# Altium PCB PA_Channel_RF1.PcbDoc (part 2 of 2)
Units mm, origin at the board's own origin, x right, y up, seen from the top; angles counter-clockwise.
Board outline 79.99 x 29.49 mm, 2 copper layers (Top Layer, Bottom Layer), stack 1.071 mm thick; 66 components, 88 nets, 184 pads, 409 vias.
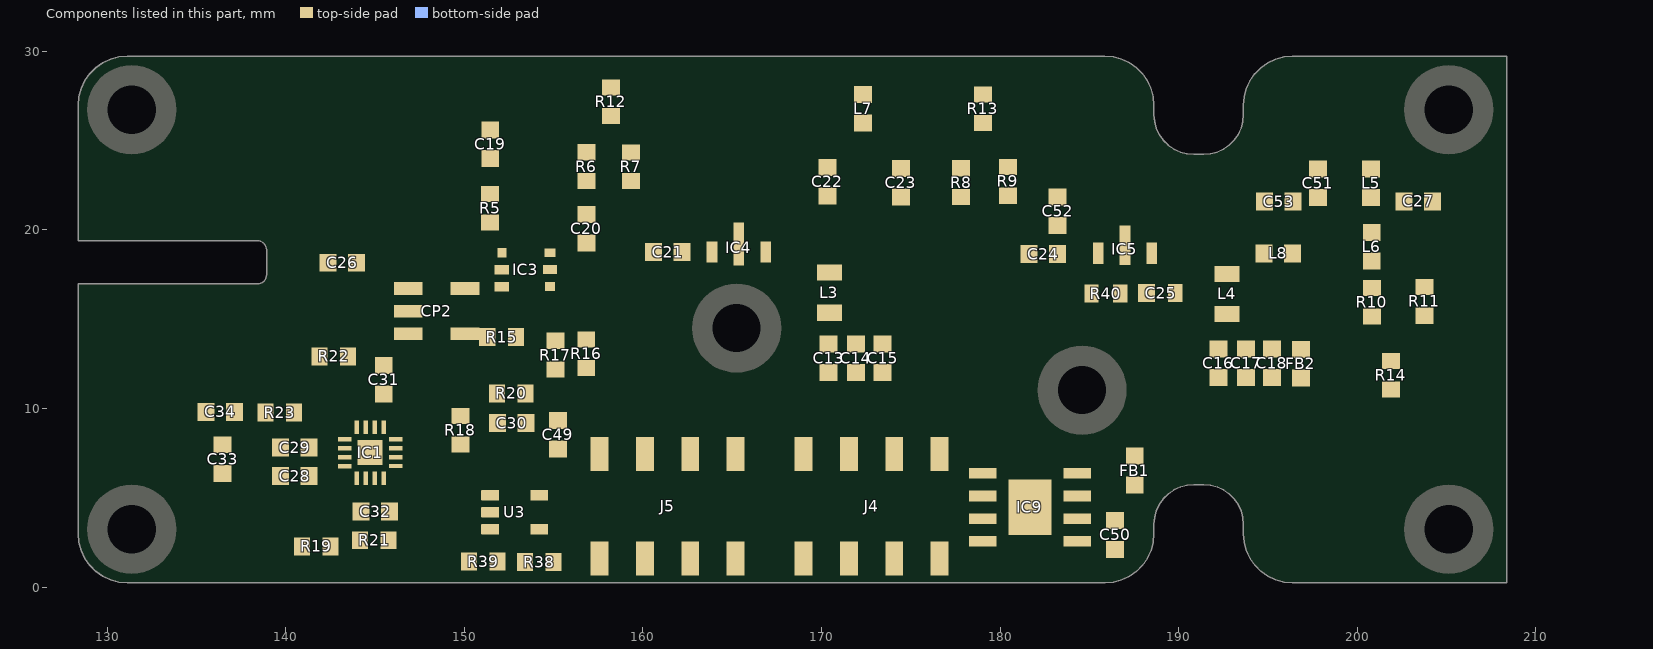
[diagram p2: the components of this part, seen from the top]

## Other copper
Top Layer:
  rectangle net NetC13_1: 169.18,13.325 174.117,15.374
  rectangle net GND: 169.322,9.972 174.259,12.021
  rectangle net NetC16_1: 191.464,13.283 197.706,15.315
  rectangle net GND: 191.163,9.701 196.1,11.75
  region net GND: 139.693,10.615 138.678,10.63 138.672,16.735 138.683,15.64 140.928,15.64 140.933,13.46 142.485,13.46 142.49,12.355 140.933,12.35 140.933,10.635 139.693,10.63
  region net GND: 129.536,1.088 129.212,1.412 128.95,1.786 128.756,2.201 128.638,2.643 128.598,3.099 128.598,12.475 139.688,12.475 139.688,10.615 134.598,10.615 134.598,0.474 131.223,0.474 130.767,0.514 130.325,0.632 129.91,0.826
  region net GND: 128.597,19.63 128.592,26.849 128.632,27.305 128.75,27.748 128.944,28.164 129.207,28.539 129.531,28.864 129.906,29.126 130.326,29.324 130.75,29.45 131.238,29.479 134.456,29.479 134.461,19.635
  region net GND: 128.604,20.369 128.599,24.868 134.149,24.874 134.149,29.48 131.132,29.48 131.221,29.48 130.774,29.448 130.333,29.33 129.919,29.137 129.546,28.875 129.222,28.552 128.961,28.179 128.767,27.765 128.649,27.323 128.609,26.868 128.639,27.325 128.757,27.768 128.951,28.184 129.214,28.559 129.538,28.883 129.913,29.146 130.329,29.34 130.772,29.459 131.009,29.479 186.063,29.48 186.289,29.46 186.71,29.347 187.106,29.163 187.464,28.913 187.773,28.604 188.023,28.247 188.207,27.851 188.32,27.429 188.359,26.983 188.359,26.458 188.396,26.04 188.507,25.623 188.69,25.233 188.951,24.867 189.321,24.497 189.677,24.282 190.44,23.999 191.907,23.999 192.615,24.329 192.968,24.577 193.271,24.881 193.518,25.233 193.701,25.623 193.812,26.04 193.849,26.458 193.849,26.982 193.888,27.428 194.001,27.85 194.184,28.246 194.435,28.604 194.743,28.912 195.101,29.163 195.497,29.346 195.919,29.46 196.365,29.499 208.107,29.499 208.112,24.243 205.109,24.238 205.109,20.345 203.656,20.34 203.651,24.714 203.494,24.824 203.195,25.17 202.962,25.537 202.876,25.746 202.8,25.989 202.751,26.364 202.756,26.736 195.374,26.736 195.374,22.155 195.569,22.155 195.574,21.049 195.374,21.044 195.374,20.749 192.823,20.744 192.818,22.728 192.608,22.728 191.603,22.725 189.304,22.728 189.304,20.334 184.679,20.329 184.671,21.247 182.668,21.247 182.663,27.299 179.584,27.299 179.584,27.024 178.479,27.019 178.474,27.299 172.874,27.299 172.874,27.024 171.769,27.019 171.764,27.299 167.704,27.299 167.704,20.424 163.079,20.419 163.074,27.689 158.784,27.689 158.784,27.439 157.679,27.434 157.674,27.689 154.219,27.689 154.219,25.368 154.119,25.363 154.119,25.014 152.714,25.009 152.709,25.363 152.019,25.363 152.019,25.014 150.914,25.009 150.909,25.363 148.234,25.363 148.234,22.733 140.939,22.728 140.939,20.754 138.684,20.749 138.679,22.728 131.109,22.728 131.109,20.374
  region net GND: 128.615,19.648 128.61,26.743 128.65,27.199 128.768,27.642 128.962,28.058 129.225,28.433 129.549,28.757 129.924,29.02 130.34,29.214 130.783,29.333 131.24,29.373 134.474,29.373 134.479,19.653
  region net GND: 152.963,8.643 152.952,16.335 153.958,16.34 153.963,14.56 153.966,13.455 153.951,8.648
  region net GND: 182.668,21.251 184.667,21.246 184.667,20.315 186.077,20.31 186.077,19.895 186.577,19.89 186.577,18.045 187.383,18.04 187.388,19.89 187.883,19.89 187.888,20.31 189.293,20.31 189.298,22.709 191.592,22.709 192.597,22.706 191.601,22.716 189.298,22.719 189.298,22.957 188.438,22.962 188.438,24.104 185.538,24.109 185.538,25.315 184.673,25.32 184.667,24.91 182.673,24.91 182.667,22.905 184.667,22.9 184.667,22.41 182.673,22.41
  region net NetC24_2: 182.669,16.909 182.667,20.739 183.778,20.739 183.778,19.32 185.933,19.32 185.938,18.045 183.778,18.04 183.778,17.05 185.533,17.05 185.538,15.775 183.973,15.77 183.967,15.94 183.641,15.94
  region net NetC25_2: 189.2,15.945 190.205,15.94 191.176,16.909 191.178,18.125 191.417,18.125 191.417,17.045 193.963,17.04 193.968,18.125 195.363,18.125 195.368,19.23 189.298,19.235 189.298,19.432 188.033,19.438 188.027,17.977 189.288,17.971 189.298,18.125 190.067,18.125 190.067,17.05 189.206,17.05
  region net GND: 192.597,22.719 192.811,22.709 192.811,20.73 195.363,20.725 195.368,21.025 195.373,22.135 195.368,24.446 192.829,24.451 192.968,24.549 193.272,24.854 193.521,25.208 193.264,24.862 192.961,24.557 192.609,24.31 191.899,23.979 192.614,24.3 192.811,24.439 192.811,22.719
  region net NetC51_2: 195.857,18.13 197.395,18.125 198.366,19.094 198.368,22.33 197.263,22.335 197.257,22.135 195.877,22.135 195.871,21.031 197.257,21.025 197.257,19.235 195.863,19.235
  region net NetC31_2: 144.921,9.844 145.346,9.839 145.346,8.571 145.602,8.571 145.608,9.839 146.027,9.839 146.032,11.344 144.927,11.349
  region net GND: 150.908,24.995 152.008,24.995 152.008,25.495 150.908,25.495
  region net NetC13_1: 169.193,14.364 171.733,14.364 171.733,15.864 169.193,15.864
  region net NetC22_2: 173.233,22.905 173.233,24.405 175.773,24.405 175.773,22.905
  region net NetC20_2: 156.286,20.32 157.386,20.32 157.386,23.32 156.286,23.32
  region net NetC22_2: 169.193,22.905 169.193,24.405 171.733,24.405 171.733,22.905
  region net GND: 152.358,13.455 152.358,14.555 153.961,14.555 153.961,13.455
  region net GND: 128.598,19.635 128.598,24.635 138.678,24.635 138.678,19.635
  region net GND: 128.598,11.735 128.598,16.735 138.678,16.735 138.678,11.735
  region net NetIC3_6: 154.29,18.445 154.29,18.995 155.09,18.995 155.09,18.445
  region net NetIC3_4: 154.29,16.335 154.29,17.095 155.09,17.095 155.09,16.335
  region net NetC19_1: 150.908,21.495 152.008,21.495 152.008,24.495 150.908,24.495
  region net GND: 150.908,24.995 152.008,24.995 152.008,25.495 150.908,25.495
  region net GND: 157.673,27.42 157.673,27.92 158.773,27.92 158.773,27.42
  region net GND: 171.763,27.005 171.763,27.505 172.863,27.505 172.863,27.005
  region net GND: 178.473,27.005 178.473,27.505 179.573,27.505 179.573,27.005
  region net NetC16_1: 191.423,14.275 193.963,14.275 193.963,15.775 191.423,15.775
  region net NetL6_2: 200.25,16.23 201.35,16.23 201.35,18.73 200.25,18.73
  region net GND: 162.753,11.747 162.747,17.134 164.977,17.14 164.977,18.135 165.783,18.14 165.788,17.14 167.693,17.14 167.698,11.753
  region net GND: 133.286,9.548 133.277,10.769 135.933,10.774 135.941,9.213 133.936,9.208 133.93,9.548
  region net NetC25_1: 186.327,15.775 187.607,15.77 187.612,15.94 188.697,15.94 188.703,17.045 186.333,17.05
  region net GND: 199.751,0.458 208.095,0.455 208.105,5.714 205.122,5.714 205.122,11.123 199.756,11.129
  region net NetC10_1: 203.231,16.23 204.337,16.225 204.342,17.225 205.098,17.225 205.098,16.942 208.098,16.942 208.098,18.62 205.098,18.62 205.098,18.335 204.205,18.335 203.233,17.366
  region net GND: 164.983,18.13 cw(c164.983,18.135) 164.977,18.135 164.977,19.985 cw(c164.983,19.985) 164.983,19.99 165.783,19.99 cw(c165.783,19.985) 165.788,19.985 165.788,18.135 cw(c165.783,18.135) 165.783,18.13
  region: 149.208,15.06 cw(c149.208,15.065) 149.202,15.065 149.202,15.825 cw(c149.208,15.825) 149.208,15.83 151.058,15.83 cw(c151.058,15.825) 151.063,15.825 151.063,15.065 cw(c151.058,15.065) 151.058,15.06
  region net GND: 138.678,20.73 cw(c138.678,20.735) 138.672,20.735 138.672,25.735 cw(c138.678,25.735) 138.678,25.74 140.928,25.74 cw(c140.928,25.735) 140.933,25.735 140.933,20.735 cw(c140.928,20.735) 140.928,20.73
  region net NetC26_2: 143.428,17.63 144.922,17.63 144.922,17.303 ccw(c144.928,17.303) 144.924,17.299 145.892,16.331 ccw(c145.896,16.335) 145.896,16.33 147.678,16.33 ccw(c147.678,16.335) 147.683,16.335 147.683,17.095 ccw(c147.678,17.095) 147.678,17.1 147.033,17.1 147.033,17.435 ccw(c147.028,17.435) 147.028,17.44 146.033,17.44 146.033,17.767 ccw(c146.028,17.767) 146.031,17.771 145.063,18.739 ccw(c145.06,18.735) 145.06,18.74 143.428,18.74 ccw(c143.428,18.735) 143.422,18.735 143.422,17.635 ccw(c143.428,17.635)
  region net NetC26_1: 139.178,17.63 cw(c139.178,17.635) 139.172,17.635 139.172,18.735 cw(c139.178,18.735) 139.178,18.74 142.928,18.74 cw(c142.928,18.735) 142.933,18.735 142.933,17.635 cw(c142.928,17.635) 142.928,17.63
  region net NetC22_1: 169.187,17.134 169.187,22.405 cw(c169.193,22.405) 169.193,22.41 171.733,22.41 cw(c171.733,22.405) 171.738,22.405 171.738,17.134 cw(c171.733,17.134) 171.733,17.129 169.193,17.129 cw(c169.193,17.134)
  region net GND: 163.074,20.401 cw(c163.074,20.406) 163.068,20.406 163.068,25.406 cw(c163.074,25.406) 163.074,25.411 167.694,25.411 cw(c167.694,25.406) 167.699,25.406 167.699,20.406 cw(c167.694,20.406) 167.694,20.401 166.289,20.401 166.289,19.986 cw(c166.284,19.986) 166.284,19.981 164.484,19.981 cw(c164.484,19.986) 164.478,19.986 164.478,20.401
  region net NetR6_1: 156.286,23.815 157.386,23.815 ccw(c157.386,23.82) 157.391,23.82 157.391,25.315 158.767,25.315 158.767,23.82 ccw(c158.773,23.82) 158.773,23.815 159.873,23.815 ccw(c159.873,23.82) 159.878,23.82 159.878,25.452 ccw(c159.873,25.452) 159.876,25.456 158.908,26.424 ccw(c158.905,26.42) 158.905,26.425 158.778,26.425 158.778,26.92 ccw(c158.773,26.92) 158.773,26.925 157.673,26.925 ccw(c157.673,26.92) 157.667,26.92 157.667,26.425 157.254,26.425 ccw(c157.254,26.42) 157.25,26.424 156.282,25.456 ccw(c156.286,25.452) 156.28,25.452 156.28,23.82 ccw(c156.286,23.82)
  region net NetC21_1: 158.769,19.184 cw(c158.773,19.188) 158.767,19.188 158.767,23.32 cw(c158.773,23.32) 158.773,23.325 159.873,23.325 cw(c159.873,23.32) 159.878,23.32 159.878,19.325 161.173,19.325 cw(c161.173,19.32) 161.178,19.32 161.178,18.22 cw(c161.173,18.22) 161.173,18.215 159.741,18.215 cw(c159.741,18.22) 159.737,18.216
  region net NetC21_2: 161.673,18.215 cw(c161.673,18.22) 161.667,18.22 161.667,19.32 cw(c161.673,19.32) 161.673,19.325 163.067,19.325 163.067,19.405 cw(c163.073,19.405) 163.073,19.41 164.333,19.41 cw(c164.333,19.405) 164.338,19.405 164.338,18.135 cw(c164.333,18.135) 164.333,18.13 163.073,18.13 cw(c163.073,18.135) 163.067,18.135 163.067,18.215
  region net NetC22_1: 166.433,18.13 cw(c166.433,18.135) 166.427,18.135 166.427,19.405 cw(c166.433,19.405) 166.433,19.41 167.693,19.41 cw(c167.693,19.405) 167.698,19.405 167.698,19.325 169.193,19.325 cw(c169.193,19.32) 169.198,19.32 169.198,18.22 cw(c169.193,18.22) 169.193,18.215 167.698,18.215 167.698,18.135 cw(c167.693,18.135) 167.693,18.13
  region net GND: 164.983,18.13 cw(c164.983,18.135) 164.977,18.135 164.977,19.985 cw(c164.983,19.985) 164.983,19.99 165.783,19.99 cw(c165.783,19.985) 165.788,19.985 165.788,18.135 cw(c165.783,18.135) 165.783,18.13
  region net NetC23_2: 174.669,20.269 cw(c174.673,20.273) 174.667,20.273 174.667,20.9 173.233,20.9 cw(c173.233,20.905) 173.227,20.905 173.227,22.405 cw(c173.233,22.405) 173.233,22.41 175.773,22.41 cw(c175.773,22.405) 175.778,22.405 175.778,20.41 177.267,20.41 177.267,22.405 cw(c177.273,22.405) 177.273,22.41 178.373,22.41 cw(c178.373,22.405) 178.378,22.405 178.378,20.273 cw(c178.373,20.273) 178.376,20.269 177.408,19.301 cw(c177.405,19.305) 177.405,19.3 175.641,19.3 cw(c175.641,19.305) 175.637,19.301
  region net NetC22_2: 170.413,24.4 171.513,24.4 ccw(c171.513,24.405) 171.518,24.405 171.518,24.9 173.447,24.9 173.447,24.405 ccw(c173.453,24.405) 173.453,24.4 174.553,24.4 ccw(c174.553,24.405) 174.558,24.405 174.558,25.037 ccw(c174.553,25.037) 174.556,25.041 173.588,26.009 ccw(c173.585,26.005) 173.585,26.01 172.868,26.01 172.868,26.505 ccw(c172.863,26.505) 172.863,26.51 171.763,26.51 ccw(c171.763,26.505) 171.757,26.505 171.757,26.01 171.381,26.01 ccw(c171.381,26.005) 171.377,26.009 170.409,25.041 ccw(c170.413,25.037) 170.407,25.037 170.407,24.405 ccw(c170.413,24.405)
  region net NetC31_1: 144.922,11.855 144.922,12.35 142.928,12.35 cw(c142.928,12.355) 142.922,12.355 142.922,13.455 cw(c142.928,13.455) 142.928,13.46 144.922,13.46 144.922,13.587 cw(c144.928,13.587) 144.924,13.591 145.892,14.559 cw(c145.896,14.555) 145.896,14.56 147.678,14.56 cw(c147.678,14.555) 147.683,14.555 147.683,13.795 cw(c147.678,13.795) 147.678,13.79 147.033,13.79 147.033,13.455 cw(c147.028,13.455) 147.028,13.45 146.033,13.45 146.033,11.855 cw(c146.028,11.855) 146.028,11.85 144.928,11.85 cw(c144.928,11.855)
  region net GND: 143.876,15.061 cw(c143.876,15.067) 143.87,15.067 143.87,15.827 cw(c143.876,15.827) 143.876,15.832 148.656,15.832 cw(c148.656,15.827) 148.661,15.827 148.661,15.067 cw(c148.656,15.067) 148.656,15.061
  region net GND: 147.678,15.06 cw(c147.678,15.065) 147.672,15.065 147.672,15.825 cw(c147.678,15.825) 147.678,15.83 148.072,15.83 148.072,17.574 147.943,17.574 cw(c147.943,17.579) 147.937,17.579 147.937,19.924 cw(c147.943,19.924) 147.943,19.929 148.943,19.929 cw(c148.943,19.924) 148.948,19.924 148.948,17.579 cw(c148.943,17.579) 148.943,17.574 148.813,17.574 148.813,13.311 cw(c148.808,13.311) 148.808,13.306 148.078,13.306 cw(c148.078,13.311) 148.072,13.311 148.072,15.06
  region net NetCP2_4: 149.208,16.33 cw(c149.208,16.335) 149.202,16.335 149.202,17.095 cw(c149.208,17.095) 149.208,17.1 152.658,17.1 cw(c152.658,17.095) 152.663,17.095 152.663,16.335 cw(c152.658,16.335) 152.658,16.33
  region net NetCP2_6: 149.208,13.79 cw(c149.208,13.795) 149.202,13.795 149.202,14.555 cw(c149.208,14.555) 149.208,14.56 151.858,14.56 cw(c151.858,14.555) 151.863,14.555 151.863,13.455 cw(c151.858,13.455) 151.858,13.45 149.858,13.45 cw(c149.858,13.455) 149.852,13.455 149.852,13.79
  region: 149.208,15.06 cw(c149.208,15.065) 149.202,15.065 149.202,15.825 cw(c149.208,15.825) 149.208,15.83 151.058,15.83 cw(c151.058,15.825) 151.063,15.825 151.063,15.065 cw(c151.058,15.065) 151.058,15.06
  region net NetIC3_1: 151.174,19.123 151.174,19.49 150.908,19.49 cw(c150.908,19.495) 150.902,19.495 150.902,20.995 cw(c150.908,20.995) 150.908,21 152.008,21 cw(c152.008,20.995) 152.013,20.995 152.013,19.495 cw(c152.008,19.495) 152.008,19.49 151.735,19.49 151.735,19 152.658,19 cw(c152.658,18.995) 152.663,18.995 152.663,18.445 cw(c152.658,18.445) 152.658,18.44 151.858,18.44 cw(c151.858,18.445) 151.854,18.441 151.176,19.119 cw(c151.18,19.123)
  region net GND: 152.658,17.49 cw(c152.658,17.495) 152.652,17.495 152.652,18.045 cw(c152.658,18.045) 152.658,18.05 152.952,18.05 152.952,19.49 152.708,19.49 cw(c152.708,19.495) 152.702,19.495 152.702,26.144 cw(c152.708,26.144) 152.708,26.149 154.208,26.149 cw(c154.208,26.144) 154.213,26.144 154.213,19.495 cw(c154.208,19.495) 154.208,19.49 153.963,19.49 153.963,16.335 cw(c153.958,16.335) 153.958,16.33 152.958,16.33 cw(c152.958,16.335) 152.952,16.335 152.952,17.49
  region net GND: 151.058,17.49 cw(c151.058,17.495) 151.052,17.495 151.052,18.045 cw(c151.058,18.045) 151.058,18.05 152.658,18.05 cw(c152.658,18.045) 152.663,18.045 152.663,17.495 cw(c152.658,17.495) 152.658,17.49
  region: 155.78,17.22 155.78,17.49 154.29,17.49 cw(c154.29,17.495) 154.284,17.495 154.284,18.045 cw(c154.29,18.045) 154.29,18.05 155.78,18.05 155.78,18.32 cw(c155.786,18.32) 155.786,18.325 157.386,18.325 cw(c157.386,18.32) 157.391,18.32 157.391,18.188 cw(c157.386,18.188) 157.389,18.184 156.421,17.216 cw(c156.418,17.22) 156.418,17.215 155.786,17.215 cw(c155.786,17.22)
  region: 156.28,18.32 156.28,19.82 cw(c156.286,19.82) 156.286,19.825 157.386,19.825 cw(c157.386,19.82) 157.391,19.82 157.391,18.188 cw(c157.386,18.188) 157.38,18.188 157.38,18.315 156.286,18.315 cw(c156.286,18.32)
  region net NetR8_1: 177.273,22.9 178.373,22.9 ccw(c178.373,22.905) 178.378,22.905 178.378,24.9 179.867,24.9 179.867,22.905 ccw(c179.873,22.905) 179.873,22.9 180.973,22.9 ccw(c180.973,22.905) 180.978,22.905 180.978,25.037 ccw(c180.973,25.037) 180.976,25.041 180.008,26.009 ccw(c180.005,26.005) 180.005,26.01 179.578,26.01 179.578,26.505 ccw(c179.573,26.505) 179.573,26.51 178.473,26.51 ccw(c178.473,26.505) 178.467,26.505 178.467,26.01 178.241,26.01 ccw(c178.241,26.005) 178.237,26.009 177.269,25.041 ccw(c177.273,25.037) 177.267,25.037 177.267,22.905 ccw(c177.273,22.905)
  region net NetC24_1: 179.869,19.094 cw(c179.873,19.098) 179.867,19.098 179.867,22.405 cw(c179.873,22.405) 179.873,22.41 180.973,22.41 cw(c180.973,22.405) 180.978,22.405 180.978,19.235 182.173,19.235 cw(c182.173,19.23) 182.178,19.23 182.178,18.13 cw(c182.173,18.13) 182.173,18.125 180.841,18.125 cw(c180.841,18.13) 180.837,18.126
  region net NetC51_1: 197.257,22.83 ccw(c197.263,22.83) 197.263,22.825 198.363,22.825 ccw(c198.363,22.83) 198.368,22.83 198.368,24.225 200.244,24.225 200.244,22.83 ccw(c200.25,22.83) 200.25,22.825 201.35,22.825 ccw(c201.35,22.83) 201.355,22.83 201.355,24.362 ccw(c201.35,24.362) 201.353,24.366 200.385,25.334 ccw(c200.382,25.33) 200.382,25.335 198.231,25.335 ccw(c198.231,25.33) 198.227,25.334 197.259,24.366 ccw(c197.263,24.362) 197.257,24.362
  region net NetC27_2: 200.244,19.23 ccw(c200.25,19.23) 200.25,19.225 201.35,19.225 ccw(c201.35,19.23) 201.355,19.23 201.355,21.025 203.15,21.025 ccw(c203.15,21.03) 203.155,21.03 203.155,22.13 ccw(c203.15,22.13) 203.15,22.135 201.355,22.135 201.355,22.33 ccw(c201.35,22.33) 201.35,22.335 200.25,22.335 ccw(c200.25,22.33) 200.244,22.33
  region net NetR10_1: 201.344,12.13 201.344,12.625 201.218,12.625 cw(c201.218,12.63) 201.214,12.626 200.246,13.594 cw(c200.25,13.598) 200.244,13.598 200.244,15.73 cw(c200.25,15.73) 200.25,15.735 201.35,15.735 cw(c201.35,15.73) 201.355,15.73 201.355,13.735 203.231,13.735 203.231,15.73 cw(c203.237,15.73) 203.237,15.735 204.337,15.735 cw(c204.337,15.73) 204.342,15.73 204.342,13.598 cw(c204.337,13.598) 204.34,13.594 203.372,12.626 cw(c203.369,12.63) 203.369,12.625 202.455,12.625 202.455,12.13 cw(c202.45,12.13) 202.45,12.125 201.35,12.125 cw(c201.35,12.13)
  region net GND: 201.344,9.63 ccw(c201.35,9.63) 201.35,9.625 202.45,9.625 ccw(c202.45,9.63) 202.455,9.63 202.455,11.63 ccw(c202.45,11.63) 202.45,11.635 201.35,11.635 ccw(c201.35,11.63) 201.344,11.63
  region net GND: 144.848,5.668 ccw(c144.854,5.668) 144.854,5.663 145.104,5.663 ccw(c145.104,5.668) 145.109,5.668 145.109,6.731 ccw(c145.104,6.731) 145.104,6.736 144.854,6.736 ccw(c144.854,6.731) 144.848,6.731
  region net GND: 144.848,5.668 ccw(c144.854,5.668) 144.854,5.663 145.104,5.663 ccw(c145.104,5.668) 145.109,5.668 145.109,6.731 ccw(c145.104,6.731) 145.104,6.736 144.854,6.736 ccw(c144.854,6.731) 144.848,6.731
  region net GND: 143.931,6.731 ccw(c143.937,6.731) 143.937,6.726 145.52,6.726 ccw(c145.52,6.731) 145.525,6.731 145.525,8.313 ccw(c145.52,8.313) 145.52,8.318 143.937,8.318 ccw(c143.937,8.313) 143.931,8.313

## Silkscreen, mask and mechanical layers (free items; w line width, h text height)
Top Overlay:
  lines w0.05: 212.875,0.36 214.375,0.36 ; 213.625,-0.39 213.625,1.11
  lines w0.1: 156.765,8.442 156.765,7.162 156.783,7.144 ; 159.558,2.718 160.505,2.718 ; 159.676,8.563 160.628,8.563 160.636,8.555 ; 162.028,2.636 162.376,2.984 ; 164.562,2.676 164.601,2.676 164.856,2.931 ; 168.853,2.749 169.383,2.749 ; 176.262,2.633 176.941,2.633
Top Solder:
  drawing of 57 lines, arcs and shapes, not listed
Bottom Solder:
  region: 165.795,11.816 160.853,11.826 160.843,6.724 165.785,6.714
  region: 152.003,7.249 150.195,7.253 150.185,2.151 151.993,2.147
  region: 151.907,3.455 150.608,4.721 147.631,1.669 148.93,0.402
  region: 165.747,2.853 167.929,5.09 163.952,8.968 161.77,6.731
  region: 162.803,0.294 164.07,1.593 160.417,5.155 159.15,3.856
  region: 161.722,0.219 161.722,5.131 154.26,5.131 154.26,0.219
  region: 161.851,0.007 161.851,4.948 154.214,4.948 154.214,0.007
  region: 164.237,0.382 165.35,1.523 161.698,5.086 160.584,3.944
  rectangle: 164.465,7.131 211.84,30.131
  rectangle: 127.5,0.25 139.5,7.25
  rectangle: 143.5,0.25 146.152,7.25
  rectangle: 139.5,0.25 144.5,3.25
  rectangle: 139.5,5.25 143.5,7.25
  rectangle: 165.278,0.25 208.125,7.25
  rectangle: 127.7,7.21 148.051,30.21
  rectangle: 147.691,20.168 165.061,30.278
  rectangle: 156.21,14.225 165.068,21.078
  rectangle: 147.258,14.017 153.949,20.517
  rectangle: 145.958,9.491 165.602,14.241
  rectangle: 147.862,12.279 154.862,18.779
  rectangle: 147.323,8.57 159.045,14.935
  region: 155.861,3.645 155.861,0.173 162.251,0.173 162.251,3.645
  region: 149.568,3.531 149.568,0.192 156.068,0.192 156.068,3.531
  region: 167.048,0.014 167.048,2.616 160.548,2.616 160.548,0.014
  region: 150.739,0.303 150.739,1.863 144.239,1.863 144.239,0.303
  region: 144.403,0.331 144.403,3.429 137.903,3.429 137.903,0.331
  region: 140.143,1.196 140.143,8.196 133.643,8.196 133.643,1.196
  region: 144.426,4.664 144.426,11.664 137.926,11.664 137.926,4.664
  region: 161.866,0.294 161.866,4.801 154.229,4.801 154.229,0.294
Mechanical 1:
  drawing of 517 lines, arcs and shapes, not listed
Mechanical 3:
  lines w0.013: 183.707,-10.178 183.707,-7.578